# EAGLE board DeviceDOut8 (EAGLE 5.00)

Size 160 x 100 mm. Coordinates in mm from the lower left corner, seen from the top.
Outline: 0,0 160,0 160,100 0,100 0,0
Copper layers (1*16): Top 0.035mm / dielectric 1.5mm / Bottom 0.035mm
Design rules "default": minimum track width 10mil, minimum drill 24mil, track to track 8mil, track to pad 8mil, pad to pad 8mil, via to via 8mil, smd to smd 8mil, copper to edge 40mil, drill to drill 8mil, minimum pad ring 10mil, minimum via ring 8mil, stop-mask expansion 4mil, vias tented up to drill 0mil, thermal gap 10mil

## Footprints (pad centres in the part's own frame; a part is rotated, then mirrored left to right if it is on the bottom)
DIL18 = drill 0.813 long: 1 -10.16,-3.81; 2 -7.62,-3.81; 3 -5.08,-3.81; 4 -2.54,-3.81; 5 0,-3.81; 6 2.54,-3.81; 7 5.08,-3.81; 8 7.62,-3.81; 9 10.16,-3.81; 10 10.16,3.81; 11 7.62,3.81; 12 5.08,3.81; 13 2.54,3.81; 14 0,3.81; 15 -2.54,3.81; 16 -5.08,3.81; 17 -7.62,3.81; 18 -10.16,3.81
DIL8 = drill 0.813 long: 1 -3.81,-3.81; 2 -1.27,-3.81; 3 1.27,-3.81; 4 3.81,-3.81; 5 3.81,3.81; 6 1.27,3.81; 7 -1.27,3.81; 8 -3.81,3.81
215875-3 = drill 0.889 round: 1 -1.905,6.35; 2 -0.635,8.89; 3 0.635,6.35; 4 1.905,8.89 | hole 3.251: -3.81,0; 3.81,0
2,15/1,0 = drill 1.016 pad 2.159 octagon: 1 0,0
0204/7 = drill 0.813 octagon: 1 -3.81,0; 2 3.81,0
MOLEX-1X6 = drill 1.016 pad 1.88 square: 1 0,0 | drill 1.016 pad 1.88 round: 2 2.54,0; 3 5.08,0; 4 7.62,0; 5 10.16,0; 6 12.7,0

## Placement (x,y rotation side)
IC1  PIC16F628P  [DIL18]  32.38,56.35 270 top
IC2  PIC12F629P  [DIL8]  45.08,11.9 0 top
J1  [215875-3]  22.22,13.17 270 top
PAD1  [2,15/1,0]  3.17,70.32 90 top
PAD2  [2,15/1,0]  3.17,63.97 90 top
PAD3  [2,15/1,0]  3.17,57.62 90 top
PAD4  [2,15/1,0]  3.17,53.81 90 top
PAD5  [2,15/1,0]  3.17,47.46 90 top
PAD6  [2,15/1,0]  3.17,41.11 90 top
PAD7  [2,15/1,0]  3.17,34.76 90 top
PAD8  [2,15/1,0]  3.17,28.41 90 top
PAD9  [2,15/1,0]  3.17,22.06 90 top
R1  [0204/7]  34.92,16.98 0 top
R2  [0204/7]  34.92,6.82 0 top
U$1  PIC-ICSPPTH  [MOLEX-1X6]  20.95,61.43 90 top
ULN1  [DIL18]  22.22,46.19 90 top

## Library data of the parts
IC1 IC2 = microchip
J1 = con-amp
PAD1-PAD9 = wirepad
R1 R2 = resistor
U$1 ULN1 = SparkFun

## Nets
5V: IC1.14 IC2.1 J1.3 R2.1 U$1.5
GND: IC1.5 IC2.8 J1.1 R1.2 U$1.4 ULN1.9
N$1: PAD1.1 ULN1.10
N$2: PAD2.1 ULN1.11
N$3: PAD3.1 ULN1.12
N$4: PAD4.1 ULN1.13
N$5: PAD5.1 ULN1.14
N$6: PAD6.1 ULN1.15
N$7: PAD7.1 ULN1.16
N$8: PAD8.1 ULN1.17
N$9: PAD9.1 ULN1.18
N$10: IC1.6 ULN1.8
N$11: IC2.3 J1.2 R2.2
N$12: IC1.16 IC2.7
N$13: IC1.7 ULN1.7
N$14: IC1.8 ULN1.6
N$15: IC1.4 U$1.6
N$16: IC1.13 U$1.3 ULN1.1
N$17: IC1.12 U$1.2 ULN1.2
N$18: IC1.9 ULN1.5
N$19: IC1.10 ULN1.4
N$20: IC1.11 ULN1.3
N$21: IC1.17 IC2.6
N$22: IC1.18 IC2.5
N$25: IC2.2 J1.4 R1.1

## Tracks (layer width: path | path; a pad name or v marks a point on that pad's centre or on a via)
5V  (4 unrouted)
GND  (5 unrouted)
N$1  (1 unrouted)
N$2  (1 unrouted)
N$3  (1 unrouted)
N$4  (1 unrouted)
N$5  (1 unrouted)
N$6  (1 unrouted)
N$7  (1 unrouted)
N$8  (1 unrouted)
N$9  (1 unrouted)
N$10  (1 unrouted)
N$11  (2 unrouted)
N$12  (1 unrouted)
N$13  (1 unrouted)
N$14  (1 unrouted)
N$15  (1 unrouted)
N$16  (2 unrouted)
N$17  (2 unrouted)
N$18  (1 unrouted)
N$19  (1 unrouted)
N$20  (1 unrouted)
N$21  (1 unrouted)
N$22  (1 unrouted)
N$25  (2 unrouted)